# Altium PCB N64802.PcbDoc
Units mil, origin at the board's own origin, x right, y up, seen from the top; angles counter-clockwise.
Board outline 6000 x 4000 mil, 2 copper layers (Top Layer, Bottom Layer); 78 components, 80 nets, 378 pads, 81 vias.
Unrouted connection lines stored in the file: 117.
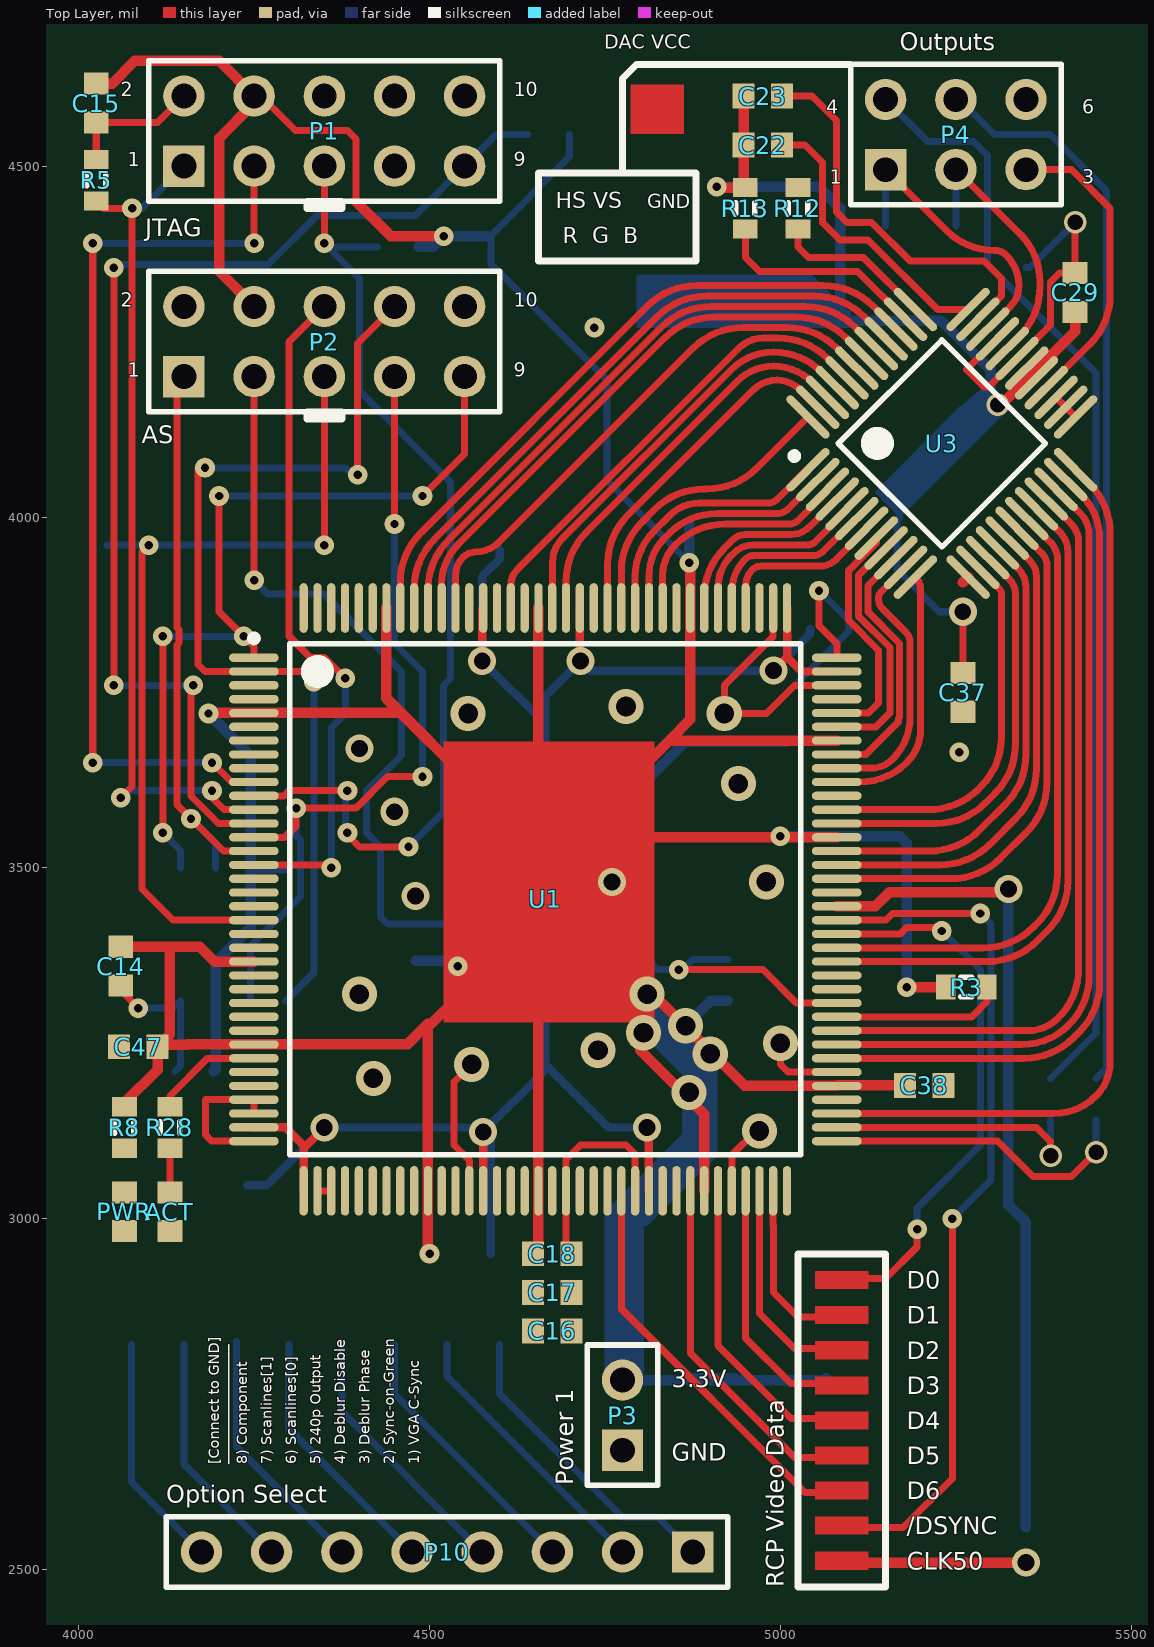
[diagram p0: Top Layer view]
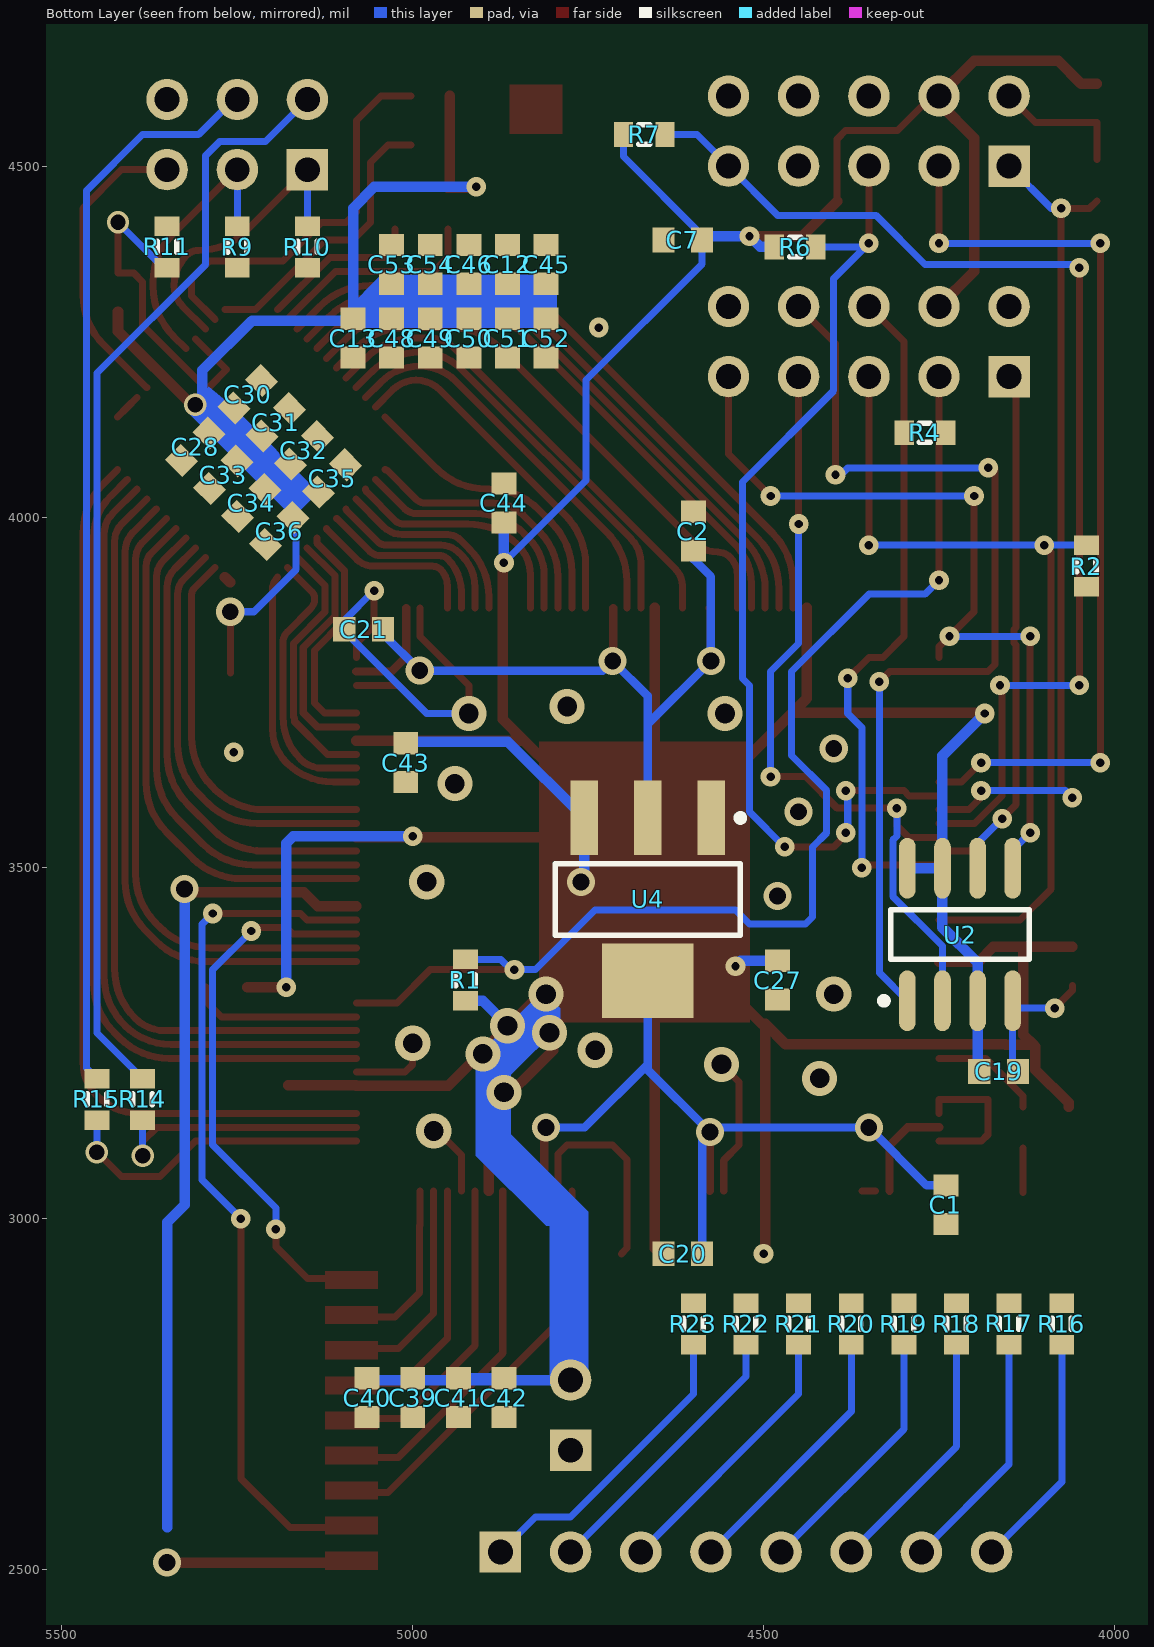
[diagram p1: Bottom Layer view, seen from below]

## Layer stack, top to bottom
Top Solder: solder mask 0.4, Solder Resist, Dk 3.5
Top Layer: signal copper 1.4
Dielectric 1: dielectric 12.6, FR-4, Dk 4.8
Bottom Layer: signal copper 1.4
Bottom Solder: solder mask 0.4, Solder Resist, Dk 3.5

## Board outline
1000,1000 7000,1000 7000,5000 1000,5000

## Design rules (kind name [scope] priority, off if disabled: settings)
Clearance [All] p1: gap=4
PolygonConnect [All] p1: connectstyle=Relief reliefconductorwidth=10 reliefentries=4 polygonreliefangle="90 Angle" airgapwidth=10
RoutingVias [All] p1: holewidth=22 width=32 viastyle="Through Hole" minholewidth=12 minwidth=28 maxholewidth=24 maxwidth=40
SolderMaskExpansion [All] p1: expansion=4
UnpouredPolygon [All] p1: allowunpoured=FALSE
Width Width_VCC3.3 [InNet('VCC3.3')] p1: maxlimit=25 minlimit=15 preferedwidth=20 minimp=50.000000 maximp=50.000000 favimp=50.000000
Width Width_VCC1.2 [InNet('VCC1.2')] p2: maxlimit=20 minlimit=12 preferedwidth=16 minimp=50.000000 maximp=50.000000 favimp=50.000000
Width Width_CLK [InNet('CLK50')] p3: maxlimit=20 minlimit=8 preferedwidth=14 minimp=50.000000 maximp=50.000000 favimp=50.000000
Width Width_1 [All] p4: maxlimit=25 minlimit=25 preferedwidth=25 minimp=50.000000 maximp=50.000000 favimp=50.000000
29 further rules are at their usual default settings.

## Components (designator, comment, footprint, x,y, rotation, side; value= is the part's Value field where it differs from the comment)
ACT "User LED" 1608[0603] 4130,3010 r270 top (schematic designator LED2)
C1 "Cap" 1608[0603] 4240,3020 r90 bottom
C2 "Cap" 1608[0603] 4600,3980 r270 bottom
C7 "Cap" 1608[0603] 4615,4395 r0 bottom
C12 "Cap" 1608[0603] 4865,4360 r270 bottom
C13 "Cap" 1608[0603] 5085,4255 r90 bottom
C14 "Cap" 1608[0603] 4060,3360 r90 top
C15 "Cap" 1608[0603] 4025,4590 r90 top
C16 "Cap" 1608[0603] 4675,2840 r180 top
C17 "Cap" 1608[0603] 4675,2895 r180 top
C18 "Cap" 1608[0603] 4675,2950 r180 top
C19 "Cap" 1608[0603] 4165,3210 r0 bottom
C20 "Cap" 1608[0603] 4615,2950 r180 bottom
C21 "Cap" 1608[0603] 5070,3840 r180 bottom
C22 "Cap" 1608[0603] 4975,4530 r0 top
C23 "Cap" 1608[0603] 4975,4600 r180 top
C27 "Cap" 1608[0603] 4480,3340 r90 bottom
C28 "Cap" 1608[0603] 5310,4100 r315 bottom
C29 "Cap" 1608[0603] 5420,4320 r90 top
C30 "Cap" 1608[0603] 5235,4175 r135 bottom
C31 "Cap" 1608[0603] 5195,4135 r135 bottom
C32 "Cap" 1608[0603] 5155,4095 r135 bottom
C33 "Cap" 1608[0603] 5270,4060 r315 bottom
C34 "Cap" 1608[0603] 5230,4020 r315 bottom
C35 "Cap" 1608[0603] 5115,4055 r135 bottom
C36 "Cap" 1608[0603] 5190,3980 r315 bottom
C37 "Cap" 1608[0603] 5260,3750 r270 top
C38 "Cap" 1608[0603] 5205,3190 r180 top
C39 "Cap" 1608[0603] 5000,2745 r90 bottom
C40 "Cap" 1608[0603] 5065,2745 r90 bottom
C41 "Cap" 1608[0603] 4935,2745 r90 bottom
C42 "Cap" 1608[0603] 4870,2745 r90 bottom
C43 "Cap" 1608[0603] 5010,3650 r90 bottom
C44 "Cap" 1608[0603] 4870,4020 r270 bottom
C45 "Cap" 1608[0603] 4810,4360 r270 bottom
C46 "Cap" 1608[0603] 4920,4360 r270 bottom
C47 "Cap" 1608[0603] 4085,3245 r180 top
C48 "Cap" 1608[0603] 5030,4255 r270 bottom
C49 "Cap" 1608[0603] 4975,4255 r270 bottom
C50 "Cap" 1608[0603] 4920,4255 r270 bottom
C51 "Cap" 1608[0603] 4865,4255 r270 bottom
C52 "Cap" 1608[0603] 4810,4255 r270 bottom
C53 "Cap" 1608[0603] 5030,4360 r90 bottom
C54 "Cap" 1608[0603] 4975,4360 r90 bottom
P1 "JTAG" HDR2X5 4150,4500 r0 top
P2 "AS" HDR2X5 4150,4200 r0 top
P3 "VIN" HDR1X2 4775,2670 r90 top
P4 "Output" HDR2X3_CEN 5150,4495 r0 top
P10 "Switches" HDR1X8 4875,2525 r180 top
PWR "Power LED" 1608[0603] 4065,3010 r270 top (schematic designator LED1)
R1 "Res3" J1-0603 4925,3340 r270 bottom
R2 "Res3" J1-0603 4040,3930 r270 bottom
R3 "Res3" J1-0603 5265,3330 r180 top
R4 "Res3" J1-0603 4270,4120 r0 bottom
R5 "Res3" J1-0603 4025,4480 r270 top
R6 "Res3" J1-0603 4455,4385 r0 bottom
R7 "Res3" J1-0603 4670,4545 r0 bottom
R8 "Res3" J1-0603 4065,3130 r90 top
R9 "Res3" J1-0603 5250,4385 r90 bottom
R10 "Res3" J1-0603 5150,4385 r90 bottom
R11 "Res3" J1-0603 5350,4385 r90 bottom
R12 "Res3" J1-0603 5025,4440 r90 top
R13 "Res3" J1-0603 4950,4440 r90 top
R14 "Res3" J1-0603 5385,3170 r90 bottom
R15 "Res3" J1-0603 5450,3170 r90 bottom
R16 "Res3" J1-0603 4075,2850 r90 bottom
R17 "Res3" J1-0603 4150,2850 r90 bottom
R18 "Res3" J1-0603 4225,2850 r90 bottom
R19 "Res3" J1-0603 4300,2850 r90 bottom
R20 "Res3" J1-0603 4375,2850 r90 bottom
R21 "Res3" J1-0603 4450,2850 r90 bottom
R22 "Res3" J1-0603 4525,2850 r90 bottom
R23 "Res3" J1-0603 4600,2850 r90 bottom
R28 "Res3" J1-0603 4130,3130 r90 top
U1 "EP2C5T144C8N" TQFP144_N 4665,3455 r0 top
U2 "EPCS4SI8N" SOIC8_N 4220,3405 r90 bottom
U3 "ADV7123JSTZ240" ST-48_M 5230,4105 r45 top
U4 "LD1117AS12TR" SOT223_M 4665,3455 r270 bottom

## Footprints (in the part's own frame and the unit in brackets; to place one, negate y for a bottom-side part, rotate by r counter-clockwise, add the part's x,y. Pads: shape width x height; smd on the part's side, far side on the other; paste and mask are expansions set on the pad)
1608[0603] [mm] "Chip Capacitor, Body 1.6x0.8mm, IPC High Density"
  rect 0.8x0.9 smd: 1(-0.7,0) 2(0.7,0)
  body extent -0.87,-0.48 0.87,0.48, height 1.3
HDR1X2 [mm] "Connector; Header; 2 Position"
  rect 1.5x1.5 hole 0.9: 1(0,0)
  round 1.5 hole 0.9: 2(2.54,0)
  silkscreen extent -1.27,-1.27 3.81,1.27
HDR1X8 [mm] "Connector; Header; 8 Position"
  rect 1.5x1.5 hole 0.9: 1(0,0)
  round 1.5 hole 0.9: 2(2.54,0) 3(5.08,0) 4(7.62,0) 5(10.16,0) 6(12.7,0) 7(15.24,0) 8(17.78,0)
  silkscreen extent -1.27,-1.27 19.05,1.27
HDR2X3_CEN [mm] "Connector; Header; 3x2 Position"
  rect 1.5x1.5 hole 0.9: 1(0,0)
  round 1.5 hole 0.9: 2(2.54,0) 3(5.08,0) 4(0,2.54) 5(2.54,2.54) 6(5.08,2.54)
  silkscreen extent -1.27,-1.27 6.35,3.81
HDR2X5 [mm] "Connector; Header; 5x2 Position"
  rect 1.5x1.5 hole 0.9: 1(0,0)
  round 1.5 hole 0.9: 2(0,2.54) 3(2.54,0) 4(2.54,2.54) 5(5.08,0) 6(5.08,2.54) 7(7.62,0) 8(7.62,2.54) 9(10.16,0) 10(10.16,2.54)
  silkscreen extent -1.27,-1.27 11.43,3.81
J1-0603 [mm] "Chip Resistor, Body 1.6x0.8mm, IPC High Density"
  rect 0.7x0.9 smd: 1(-0.75,0) 2(0.75,0)
  silkscreen extent -0.2,-0.35 0.2,0.35, body extent -0.85,-0.48 0.85,0.48, height 0.9
SOIC8_N [mm] "SOIC, 8-Leads, Body 4.9x3.9mm, Pitch 1.27mm, IPC Medium Density"
  oval 2.2x0.6 smd: 1(-2.4,1.905) 2(-2.4,0.635) 3(-2.4,-0.635) 4(-2.4,-1.905) 5(2.4,-1.905) 6(2.4,-0.635) 7(2.4,0.635) 8(2.4,1.905)
  silkscreen extent -2.52,-2.5 0.9,2.88, body extent -2,-2.5 2,2.5, height 1.75
SOT223_M [mm] "SOT223, 4-Leads, Body 6.5x3.5mm, Pitch 2.3mm, Lead Span 7mm, IPC Low Density"
  rect 2.7x1 smd: 1(-2.95,2.3) 2(-2.95,0) 3(-2.95,-2.3)
  rect 2.7x3.3 smd: 4(2.95,0)
  silkscreen extent -3.07,-3.35 1.3,3.47, body extent -1.85,-3.35 1.85,3.35, height 1.7
ST-48_M [mm] "Thin QFP, 48-Leads, Body 7x7mm, Pitch 0.5mm, IPC Low Density"
  oval 2.1x0.3 smd: 1(-4.1,2.75) 2(-4.1,2.25) 3(-4.1,1.75) 4(-4.1,1.25) 5(-4.1,0.75) 6(-4.1,0.25) 7(-4.1,-0.25) 8(-4.1,-0.75) 9(-4.1,-1.25) 10(-4.1,-1.75) 11(-4.1,-2.25) 12(-4.1,-2.75) 25(4.1,-2.75) 26(4.1,-2.25) 27(4.1,-1.75) 28(4.1,-1.25) 29(4.1,-0.75) 30(4.1,-0.25) 31(4.1,0.25) 32(4.1,0.75) 33(4.1,1.25) 34(4.1,1.75) 35(4.1,2.25) 36(4.1,2.75)
  oval 0.3x2.1 smd: 13(-2.75,-4.1) 14(-2.25,-4.1) 15(-1.75,-4.1) 16(-1.25,-4.1) 17(-0.75,-4.1) 18(-0.25,-4.1) 19(0.25,-4.1) 20(0.75,-4.1) 21(1.25,-4.1) 22(1.75,-4.1) 23(2.25,-4.1) 24(2.75,-4.1) 37(2.75,4.1) 38(2.25,4.1) 39(1.75,4.1) 40(1.25,4.1) 41(0.75,4.1) 42(0.25,4.1) 43(-0.25,4.1) 44(-0.75,4.1) 45(-1.25,4.1) 46(-1.75,4.1) 47(-2.25,4.1) 48(-2.75,4.1)
  silkscreen extent -4.22,-2.65 2.65,3.57, body extent -3.5,-3.5 3.5,3.5, height 1.6
TQFP144_N [mm] "Thin QFP, 144-Leads, Body 20x20mm, Pitch 0.5mm, IPC Medium Density"
  oval 1.8x0.3 smd: 1(-10.55,8.75) 2(-10.55,8.25) 3(-10.55,7.75) 4(-10.55,7.25) 5(-10.55,6.75) 6(-10.55,6.25) 7(-10.55,5.75) 8(-10.55,5.25) 9(-10.55,4.75) 10(-10.55,4.25) 11(-10.55,3.75) 12(-10.55,3.25) 13(-10.55,2.75) 14(-10.55,2.25) 15(-10.55,1.75) 16(-10.55,1.25) 17(-10.55,0.75) 18(-10.55,0.25) 19(-10.55,-0.25) 20(-10.55,-0.75) 21(-10.55,-1.25) 22(-10.55,-1.75) 23(-10.55,-2.25) 24(-10.55,-2.75) 25(-10.55,-3.25) 26(-10.55,-3.75) 27(-10.55,-4.25) 28(-10.55,-4.75) 29(-10.55,-5.25) 30(-10.55,-5.75) 31(-10.55,-6.25) 32(-10.55,-6.75) 33(-10.55,-7.25) 34(-10.55,-7.75) 35(-10.55,-8.25) 36(-10.55,-8.75) 73(10.55,-8.75) 74(10.55,-8.25) 75(10.55,-7.75) 76(10.55,-7.25) 77(10.55,-6.75) 78(10.55,-6.25) 79(10.55,-5.75) 80(10.55,-5.25) 81(10.55,-4.75) 82(10.55,-4.25) 83(10.55,-3.75) 84(10.55,-3.25) 85(10.55,-2.75) 86(10.55,-2.25) 87(10.55,-1.75) 88(10.55,-1.25) 89(10.55,-0.75) 90(10.55,-0.25) 91(10.55,0.25) 92(10.55,0.75) 93(10.55,1.25) 94(10.55,1.75) 95(10.55,2.25) 96(10.55,2.75) 97(10.55,3.25) 98(10.55,3.75) 99(10.55,4.25) 100(10.55,4.75) 101(10.55,5.25) 102(10.55,5.75) 103(10.55,6.25) 104(10.55,6.75) 105(10.55,7.25) 106(10.55,7.75) 107(10.55,8.25) 108(10.55,8.75)
  oval 0.3x1.8 smd: 37(-8.75,-10.55) 38(-8.25,-10.55) 39(-7.75,-10.55) 40(-7.25,-10.55) 41(-6.75,-10.55) 42(-6.25,-10.55) 43(-5.75,-10.55) 44(-5.25,-10.55) 45(-4.75,-10.55) 46(-4.25,-10.55) 47(-3.75,-10.55) 48(-3.25,-10.55) 49(-2.75,-10.55) 50(-2.25,-10.55) 51(-1.75,-10.55) 52(-1.25,-10.55) 53(-0.75,-10.55) 54(-0.25,-10.55) 55(0.25,-10.55) 56(0.75,-10.55) 57(1.25,-10.55) 58(1.75,-10.55) 59(2.25,-10.55) 60(2.75,-10.55) 61(3.25,-10.55) 62(3.75,-10.55) 63(4.25,-10.55) 64(4.75,-10.55) 65(5.25,-10.55) 66(5.75,-10.55) 67(6.25,-10.55) 68(6.75,-10.55) 69(7.25,-10.55) 70(7.75,-10.55) 71(8.25,-10.55) 72(8.75,-10.55) 109(8.75,10.55) 110(8.25,10.55) 111(7.75,10.55) 112(7.25,10.55) 113(6.75,10.55) 114(6.25,10.55) 115(5.75,10.55) 116(5.25,10.55) 117(4.75,10.55) 118(4.25,10.55) 119(3.75,10.55) 120(3.25,10.55) 121(2.75,10.55) 122(2.25,10.55) 123(1.75,10.55) 124(1.25,10.55) 125(0.75,10.55) 126(0.25,10.55) 127(-0.25,10.55) 128(-0.75,10.55) 129(-1.25,10.55) 130(-1.75,10.55) 131(-2.25,10.55) 132(-2.75,10.55) 133(-3.25,10.55) 134(-3.75,10.55) 135(-4.25,10.55) 136(-4.75,10.55) 137(-5.25,10.55) 138(-5.75,10.55) 139(-6.25,10.55) 140(-6.75,10.55) 141(-7.25,10.55) 142(-7.75,10.55) 143(-8.25,10.55) 144(-8.75,10.55)
  silkscreen extent -10.67,-9.25 9.25,9.57, body extent -10,-10 10,10, height 1.6

## Part data
ACT PWR: library part LED2, "Typical RED, GREEN, YELLOW, AMBER GaAs LED"
C1 C2 C7 C12 C13 C14 C15 C16 C17 C18 C19 C20 C21 C22 C23 C27 C28 C29 C30 C31 C32 C33 C34 C35 C36 C37 C38 C39 C40 C41 C42 C43 C44 C45 C46 C47 C48 C49 C50 C51 C52 C53 C54: library part "Cap Semi", "Capacitor (Semiconductor SIM Model)"
P1 P2: library part "Header 5X2", "Header, 5-Pin, Dual row"
P3: library part "Header 2", "Header, 2-Pin"
P4: library part "Header 3X2A", "Header, 3-Pin, Dual row"
P10: library part "Header 8", "Header, 8-Pin"
R1 R2 R3 R4 R5 R6 R7 R8 R9 R10 R11 R12 R13 R14 R15 R16 R17 R18 R19 R20 R21 R22 R23 R28: "Resistor"
U1: "Cyclone II Family, 1.2V FPGA, 89 I/O Pins, 2 PLLs, 144-Pin TQFP, Speed Grade 8, Commercial Grade, Pb-Free"
U2: "EPCS4 Series, In-system programmable 3.3V serial configuration device, 8-Pin SOIC, 4-Megabit, Industrial Grade, Pb-Free"
U3: "3 Channel 10-Bit CMOS High Speed Video Digital-to-Analog Converter, 330 MHz, 0 to 70 degC, ST-48, Pb-Free, Tray"
U4: "1A, Low Drop Positive Voltage Regulator, 1.2V, 4-Pin SOT-223, Tape and Reel"

## Via types
v1: diameter 28, hole 12, Top Layer to Bottom Layer, 48 vias
v2: diameter 50, hole 28, Top Layer to Bottom Layer, 16 vias
v3: diameter 40, hole 24, Top Layer to Bottom Layer, 13 vias
v4: diameter 32, hole 22, Top Layer to Bottom Layer, 4 vias

## Nets (pads, with @x,y where several pads share a name; then routed paths per layer and width w, separated by ;. In a path a pad name is that pad's centre, name@x,y a point inside that pad or via, vN(x,y) a via of type N, cw(c..) or ccw(c..) an arc to the next point about the centre after c; other vN are vias at no path point)
/DSYNC: U1.89 | length 1231.6
  Top Layer w10: U1.89 5150.47,3425.47 5160,3435 v1(5285,3435) ; 5085,2560 5175,2560 5245,2630 v1(5245,3000)
  Bottom Layer w10: v1(5245,3000) 5300,3055 5300,3420 v1(5285,3435)
/SW_15KHZ: P10.5 R19.1 U1.43
/SW_SCAN0: P10.6 R18.1 U1.42
/SW_SCAN1: P10.7 R17.1 U1.41
/SW_SHARP_COL: P10.3 R21.1 U1.45
/SW_SHARP_EN: P10.4 R20.1 U1.44
/SW_SOG: P10.2 R22.1 U1.47
/SW_VGA_CSYNC: P10.1 R23.1 U1.48
/SW_YPBPR: P10.8 R16.1 U1.40
ASDO: P2.9 U1.1 U2.5 | length 1191.8
  Top Layer w10: v1(4120,3550) v1(4120,3830) ; v1(4200,4030) 4200,3865 v1(4235,3830) 4249.65,3815.35 U1.1 ; v1(4490,4030) 4550,4090 P2.9
  Bottom Layer w10: v1(4120,3550) 4145,3525 U2.5 ; v1(4120,3830) v1(4235,3830) ; v1(4200,4030) v1(4490,4030)
CLK50: U1.90 | length 1445.5
  Top Layer w15: U1.90 5135.16,3445.16 5155.5,3465.5 5300.56,3465.5 5301.06,3465 5324.69,3465 5325,3465.32 v3(5325,3470) ; 5085,2515 5090,2510 v3(5350,2510)
  Bottom Layer w15: v3(5325,3470) 5325,3020 5350,2995 5350,2560
CONF_DONE: P2.3 R1.1 U1.83 | length 1726.6
  Top Layer w10: v1(4250,3910) P2.3 ; v1(4855,3355) 4975,3355 5022.64,3307.36 U1.83
  Bottom Layer w10: v1(4250,3910) 4270,3890 4350,3890 4460,3780 4460,3660 4410,3610 4410,3550 4430,3530 4430,3430 4440,3420 4520,3420 4540,3440 4740,3440 4825,3355 v1(4855,3355) 4860,3355 4874.53,3369.53 R1.1
D0: U1.88 | length 789.2
  Top Layer w10: U1.88 5170.79,3405.79 5180,3415 5225,3415 v1(5230,3410) ; 5090,2915 5150,2915 5195,2960 v1(5195,2985)
  Bottom Layer w10: v1(5195,2985) 5195,3015 5285,3105 5285,3355 v1(5230,3410)
D1: U1.71 | length 254.2
  Top Layer w10: U1.71 4989.8,2990.2 4990,2990 4990,2895 5025,2860 5085,2860
D2: U1.70 | length 315.3
  Top Layer w10: U1.70 4970.12,2864.88 5020,2815 5090,2815
D3: U1.69 | length 376.4
  Top Layer w10: U1.69 4950.43,2829.57 5015,2765 5090,2765
D4: U1.67 | length 442.7
  Top Layer w10: U1.67 4911.06,2818.94 5015,2715 5090,2715
D5: U1.65 | length 511.1
  Top Layer w10: U1.65 4871.69,2808.31 5020,2660 5090,2660
D6: U1.60 | length 593.1
  Top Layer w10: U1.60 4773.27,2871.73 5035,2610 5090,2610
DATA0: P2.7 U1.14 U2.2 | length 1183.6
  Top Layer w10: U1.14 4293.58,3543.58 4310,3560 v1(4310,3585) 4395,3585 4440,3630 v1(4490,3630) ; v1(4450,3990) P2.7
  Bottom Layer w10: U2.2 4245,3388.56 4315.81,3459.37 4315.81,3539.6 4310,3545.42 v1(4310,3585) ; v1(4450,3990) 4450,3820 4490,3780 v1(4490,3630)
DCLK: P2.1 U1.15 U2.6 | length 838.7
  Top Layer w10: P2.1 4140,4190 4140,3842.53 4143,3839.53 4143,3820.47 4140,3817.47 4140,3590 4206.1,3523.9 U1.15
  Bottom Layer w10: v1(4160,3570) 4195,3535 U2.6
GND: ACT.2 C1.1 C2.1 C7.2 C12.1 C13.1 C14.1 C15.1 C16.1 C17.1 C18.1 C19.1 C20.1 C21.1 C27.1 C28.2 C29.2 C30.2 C31.2 C32.2 C33.2 C34.2 C35.2 C36.2 C37.2 C38.1 C39.1 C40.1 C41.1 C42.1 C43.1 C44.1 C45.1 C46.1 C47.2 C48.2 C49.2 C50.2 C51.2 C52.2 C53.2 C54.2 P1.2 P1.10 P2.2 P2.10 P3.1 P4.6 PWR.2 R4.1 R5.1 R9.1 R10.1 R11.1 R12.2 U1.6 U1.19 U1.33 U1.34 U1.36 U1.38 U1.39 U1.49 U1.56 U1.61 U1.68 U1.78 U1.84 U1.85 U1.98 U1.106 U1.108 U1.110 U2.4 U3.25 U3.26 U3.27 U3.31 U3.33 U4.1 | length 2659.5
  Top Layer w10: R5.1 C15.1 4112.44,4562.44 P1.2 ; C14.1 4060,3325 v1(4085,3300) ; U1.36 4189.49,3110.51 4180.43,3119.57 4180.43,3169.57 U1.33 U1.34 ; U1.38 U1.39 ; U1.49 4556.73,3083.27 4535,3105 4535,3195 v2(4560,3220) ; C18.1 4694.53,2958.03 U1.56 4694.53,3084.53 4715,3105 4780,3105 4792.95,3092.05 U1.61 ; U1.68 4930.75,3090.75 4965,3125 v2(4970,3125) ; U1.110 4989.8,3829.8 4920,3760 v2(4920,3720) 4980,3720 5020.12,3760.12 U1.106 ; v2(5000,3250) 5000,3220 5011.06,3208.94 U1.78 ; v1(5055,3895) 5055,3845 5080.35,3819.65 U1.108 ; U3.33 5265.4,4210 5290,4185.4 5296.48,4185.4 U3.31 5384.98,4273.9 5384.98,4334.98 5397.56,4347.56 C29.2 v4(5420,4420) ; U3.27 U3.26 U3.25
  Bottom Layer w10: v1(4085,3300) 4134.49,3300 U2.4 4145,3217.56 C19.1 ; v2(4920,3720) 4980,3720 5097.56,3837.56 C21.1 5097.56,3852.44 v1(5055,3895) ; R11.1 5355.47,4355.47 v4(5420,4420)
  other v1: 4735,4270
  other v2: 4420,3200 4740,3240 4400,3320 4980,3480 4940,3620 4555,3720 4780,3730
  other v3: 4480,3460 4450,3580 4400,3670
NCE: P2.6 R4.2 U1.16 | length 985.9
  Top Layer w10: U1.16 4355.79,3504.21 v1(4360,3500) ; P2.6 4300,4250 4300,3830 4330,3800 4350,3800 v1(4380,3770)
  Bottom Layer w10: v1(4360,3500) 4360,3700 4380,3720 v1(4380,3770)
NCONFIG: P2.5 R2.1 U1.20 | length 1222.4
  Top Layer w10: v1(4100,3960) 4090,3950 4090,3470 4134.53,3425.47 U1.20 ; v1(4350,3960) P2.5
  Bottom Layer w10: R2.1 4040.47,3960 v1(4100,3960) v1(4350,3960)
NCSO: P2.8 U1.2 U2.1 | length 1433.9
  Top Layer w10: v1(4180,4070) 4180,4080 4170,4070 4170,3790 4180.2,3779.8 U1.2 4320.2,3779.8 v1(4335,3765) ; v1(4397.5,4060) 4397.5,4247.5 P2.8
  Bottom Layer w10: v1(4180,4070) 4380,4070 4390,4060 v1(4397.5,4060) ; U2.1 4335,3350.51 v1(4335,3765)
NetACT_1: ACT.1 R28.1 | length 62.9
  Top Layer w10: ACT.1 R28.1
NetP4_4: P4.4 R14.2 | length 1584.7
  Bottom Layer w10: P4.4 5210,4535 5275,4535 5295,4515 5295,4360 5450,4205 5450,3264.53 R14.2
NetP4_5: P4.5 R15.2 | length 1540.5
  Bottom Layer w10: P4.5 5255,4595 5305,4545 5385,4545 5465,4465 5465,3214.53 R15.2
NetPWR_1: PWR.1 R8.1
NSTATUS: R3.1 U1.82 | length 243.7
  Top Layer w10: U1.82 5272.68,3287.68 5294.53,3309.53 R3.1
TCK: P1.1 R5.2 U1.12 | length 1201.7
  Top Layer w10: R5.2 4035.47,4440 v1(4076,4440) 4076,3616 v1(4060,3600) ; v1@4190,3600 4207.05,3582.95 U1.12
  Bottom Layer w10: v1(4060,3600) 4070,3610 v1(4190,3610) ; v1(4076,4440) 4090,4440 P1.1
TDI: P1.9 R7.1 U1.13 | length 1641.8
  Top Layer w10: v1(4050,3760) v1(4050,4355) ; v1(4163,3760) 4160,3757 4160,3602.53 4199.26,3563.27 U1.13
  Bottom Layer w10: v1(4050,3760) v1(4163,3760) ; v1(4050,4355) 4055,4360 4270,4360 4340,4430 4480,4430 P1.9 4595,4545 R7.1
TDO: P1.3 U1.10 | length 1321.1
  Top Layer w10: v1(4020,3650) v1(4020,4390) ; v1(4190,3650) 4217.68,3622.32 U1.10 ; v1(4250,4390) P1.3
  Bottom Layer w10: v1(4020,3650) v1(4190,3650) ; v1(4020,4390) v1(4250,4390)
TMS: P1.5 R6.1 U1.11 | length 1437.6
  Top Layer w10: U1.11 4292.64,3602.64 4300,3610 v1(4383,3610) ; v1(4350,4390) P1.5 ; v1(4383,3550) 4383,3547 4400,3530 v1(4470,3530)
  Bottom Layer w10: v1(4350,4390) v1@4355,4385 ; v1(4383,3550) 4380,3553 4380,3610 v1(4383,3610) ; R6.1 v1@4355,4385 ; v1(4470,3530) 4520,3580 4520,3760 4530,3770 4530,4050 4400,4180 4400,4340 v1@4355,4385
USER_LED: R28.2 U1.30 | length 157.3
  Top Layer w10: R28.2 4130,3175 4183.62,3228.62 U1.30
VCC1.2: C1.2 C2.2 C20.2 C21.2 U1.35 U1.37 U1.50 U1.62 U1.107 U1.109 U1.124 U1.131 U4.2 U4.4 | length 2577
  Top Layer w12: U1.35 4294.8,3130.2 4320.51,3104.49 ; U1.37 4320.51,3104.49 ; v3(4350,3130) 4324.49,3104.49 4320.51,3104.49 ; v3(4575,3795) 4575,3868.94 U1.131 ; U1.50 v3(4576.42,3123.58) ; U1.124 4714.21,3795.79 v3(4715,3795) ; v3(4810,3130) 4812.64,3127.36 U1.62 ; v3(4990,3781.02) 5009.49,3800.51 ; U1.109 5009.49,3800.51 ; U1.107 5030.2,3779.8 5009.49,3800.51
  Bottom Layer w12: C1.2 4267.56,3047.56 v3(4350,3130) 4570,3130 v3(4576.42,3123.58) ; C20.2 4587.44,3112.56 v3(4576.42,3123.58) ; C2.2 4600,3940 4575,3915 v3(4575,3795) 4665,3705 ; U4.4 4665,3220 ; U4.2 4665,3705 ; v3(4810,3130) 4755,3130 4665,3220 ; C21.2 5042.44,3833.46 v3(4990,3781.02) 4728.98,3781.02 v3(4715,3795) 4665,3745 4665,3705 ; v3(4576.42,3123.58) 4665,3212.17 4665,3220
VCC3.3: C7.1 C12.2 C13.2 C14.2 C15.2 C16.2 C17.2 C18.2 C19.2 C38.2 C39.2 C40.2 C41.2 C42.2 C43.2 C44.2 C45.2 C46.2 P1.4 P2.4 P3.2 R1.2 R2.2 R3.2 R6.2 R7.2 R8.2 R16.2 R17.2 R18.2 R19.2 R20.2 R21.2 R22.2 R23.2 U1.5 U1.23 U1.29 U1.46 U1.54 U1.66 U1.77 U1.95 U1.102 U1.116 U1.127 U1.138 U2.3 U2.7 U2.8 U4.3 | length 7177.2
  Top Layer w10: P1.4 4260,4600 4309,4551 4383,4551 4395,4539 4395,4450
  Top Layer w15: C15.2 4047.56,4617.56 4080,4650 4200,4650 P1.4 4250,4590 4200,4540 4200,4350 P2.4 ; C14.2 4130,3387.56 ; R8.2 4065,3165 4112.56,3212.56 4112.56,3245 4115.12,3247.56 ; v1(4185,3720) 4185.75,3720.75 U1.5 4459.25,3720.75 ; U1.23 4193.58,3366.42 4172.44,3387.56 4130,3387.56 ; 4395,4450 4445,4400 v1(4520,4400) ; U1.138 4438.62,3741.38 4459.25,3720.75 ; v1(4500,2950) 4497.68,2952.32 U1.46 4497.68,3277.68 ; v1(4540,3360) 4540,3315 4502.68,3277.68 4497.68,3277.68 ; 4540,3640 4459.25,3720.75 ; C18.2 4655.16,2957.72 U1.54 4655.16,3315.16 4660,3320 ; U1.127 4655.16,3644.84 4660,3640 ; 4780,3540 4783.58,3543.58 v1@5001.42,3543.58 ; v2@4800,3320 4800,3240 4891.38,3148.62 U1.66 ; v2@4800,3340 4800,3338.5 4949.25,3189.25 U1.77 5081.1,3190 C38.2 ; 4800,3640 4841.38,3681.38 ; v1(4870,3935) 4871.69,3933.31 U1.116 4871.69,3711.69 4841.38,3681.38 ; v1(5000,3545) v1@5001.42,3543.58 ; U1.95 v1@5001.42,3543.58 ; U1.102 4841.38,3681.38 ; v1(5180,3330) R3.2 ; 5260,3906.72 5267.58,3914.3 ; 4115.12,3247.56 4155,3247.56 4155.75,3248.31 U1.29 4468.31,3248.31 4497.68,3277.68 ; 4115.12,3247.56 4130,3262.44 4130,3387.56
  Bottom Layer w15: v1(4185,3720) 4245,3660 U2.7 ; C19.2 4195,3212.44 U2.3 4195,3365 4245,3415 U2.7 ; U2.8 U2.7 ; 4480,3367.56 4532.44,3367.56 v1(4540,3360) ; R6.2 4505,4385 v1(4520,4400) C7.1@4582.44,4400 ; v3(4760,3480) 4755.55,3484.45 U4.3 4864.41,3680 C43.2@5010,3680 ; P3.2 5062.44,2770 C40.2 ; v2(4865,3275) 4900.47,3310.47 R1.2 ; C42.2 C41.2 ; v1(4870,3935) C44.2 ; v1(5000,3545) 5170,3545 5180,3535 v1(5180,3330)
  other v2: 4870,3180 4900,3235 4805,3265 4810,3320
VCC5.0: C22.1 C23.2 C27.2 C28.1 C29.1 C30.1 C31.1 C32.1 C33.1 C34.1 C35.1 C36.1 C37.1 C47.1 C48.1 C49.1 C50.1 C51.1 C52.1 C53.1 C54.1 R13.2 U3.13 U3.29 U3.30 | length 1092.9
  Top Layer w10: C37.1 v3(5260,3865) ; v4(5310,4160) v4@5310,4171.08
  Top Layer w15: v1(4909.53,4470.47) 4909.53,4469.53 R13.2 ; R13.2@4947.44,4472.09 C22.1 C23.2 ; v4(5310,4160) 5315,4160 5420,4265 C29.1
  Bottom Layer w15: v1(4909.53,4470.47) 5054.53,4470.47 5085,4440 5085,4282.56 5087.56,4280 5229,4280 5300,4209 5300,4170 v4(5310,4160)
VGA_B0: U1.97 U3.14 | length 548.3
  Top Layer w10: U1.97 5211.53,3582.95 ccw(c5211.53,3682.95) 5282.24,3612.24 5285.71,3615.71 ccw(c5215,3686.42) 5315,3686.42 5315,3890 ccw(c5303.59,3890) 5311.66,3898.07 U3.14
VGA_B1: U1.96 U3.15 | length 598
  Top Layer w10: U1.96 5221.85,3563.27 ccw(c5221.85,3663.27) 5292.56,3592.56 5305.71,3605.71 ccw(c5235,3676.42) 5335,3676.42 5335,3890 ccw(c5304.67,3890) 5326.12,3911.45 U3.15
VGA_B2: U1.94 U3.16 | length 652.2
  Top Layer w10: U1.94 5212.48,3523.9 ccw(c5212.48,3623.9) 5283.19,3553.19 5320.71,3590.71 ccw(c5250,3661.42) 5350,3661.42 5350,3900 ccw(c5312.81,3900) 5339.11,3926.29 U3.16
VGA_B3: U1.93 U3.17 | length 701.6
  Top Layer w10: U1.93 5227.79,3504.21 ccw(c5227.79,3604.21) 5298.5,3533.5 5335.71,3570.71 ccw(c5265,3641.42) 5365,3641.42 5365,3915 ccw(c5333.03,3915) 5355.64,3937.61 U3.17
VGA_B4: U1.92 U3.18 | length 751.1
  Top Layer w10: U1.92 5243.11,3484.53 ccw(c5243.11,3584.53) 5313.82,3513.82 5350.71,3550.71 ccw(c5280,3621.42) 5380,3621.42 5380,3930 ccw(c5353.25,3930) 5372.16,3948.92 U3.18
VGA_B5: U1.87 U3.19 | length 897.1
  Top Layer w10: U1.87 5289.68,3386.1 ccw(c5289.68,3486.1) 5360.39,3415.39 5365.71,3420.71 ccw(c5295,3491.42) 5395,3491.42 5395,3940 ccw(c5361.4,3940) 5385.16,3963.76 U3.19
VGA_B6: U1.86 U3.20 | length 940.1
  Top Layer w10: U1.86 5295,3366.42 ccw(c5295,3466.42) 5365.71,3395.71 5380.71,3410.71 ccw(c5310,3481.42) 5410,3481.42 5410,3950 ccw(c5369.54,3950) 5398.15,3978.61 U3.20
VGA_B7: U1.81 U3.21 | length 1085.4
  Top Layer w10: U1.81 5352.93,3267.99 ccw(c5352.93,3328.49) 5395.71,3285.71 ccw(c5325,3356.42) 5425,3356.42 5425,3965 ccw(c5389.76,3965) 5414.68,3989.92 U3.21
VGA_B8: U1.80 U3.22 | length 1127.1
  Top Layer w10: U1.80 5344.55,3248.31 ccw(c5344.55,3341.87) 5410.71,3275.71 ccw(c5340,3346.42) 5440,3346.42 5440,3975 ccw(c5397.91,3975) 5427.67,4004.77 U3.22
VGA_B9: U1.79 U3.23 | length 1168.3
  Top Layer w10: U1.79 5347.2,3228.62 ccw(c5347.2,3328.62) 5417.91,3257.91 5425.71,3265.71 ccw(c5355,3336.42) 5455,3336.42 5455,3970 ccw(c5369.84,3970) 5430.06,4030.22 U3.23
VGA_BLANK_N: U1.100 U3.11 | length 395.3
  Top Layer w10: U1.100 5128.63,3642.01 ccw(c5128.63,3686.37) 5160,3655 ccw(c5099.64,3715.36) 5185,3715.36 5185,3820 ccw(c5160.86,3820) 5177.93,3837.07 5145,3870 cw(c5157.07,3882.07) 5140,3882.07 5140,3885 cw(c5151.41,3885) 5143.34,3893.07 U3.11
VGA_CLOCK: U1.75 U3.24 | length 1290.2
  Top Layer w10: U1.75 5389.36,3149.88 ccw(c5389.36,3235.64) 5450,3175 ccw(c5401.72,3223.28) 5470,3223.28 5470,3976.69 ccw(c5370,3976.69) 5440.71,4047.4 U3.24
VGA_COMP: C23.1 U3.35 | length 568.5
  Top Layer w10: C23.1 5045,4600 5080,4565 5080,4435 5095,4420 5130,4420 5185,4365 5290,4365 5315,4340 5315,4315 5281.78,4281.78 U3.35
VGA_G0: U1.120 U3.1 | length 368.9
  Top Layer w10: U1.120 4792.95,3914.7 cw(c4885.3,3914.7) 4820,3980 4842.32,4002.32 cw(c4885,3959.64) 4885,4020 4982.93,4020 ccw(c4982.93,4037.07) 4995,4025 5036.08,4066.08 cw(c5039.3,4062.86) U3.1
VGA_G1: U1.119 U3.2 | length 353.3
  Top Layer w10: U1.119 4812.64,3916.01 cw(c4888.99,3916.01) 4835,3970 4841.72,3976.72 cw(c4910,3908.43) 4910,4005 4995,4005 ccw(c4995,4028.48) 5011.6,4011.88 U3.2
VGA_G2: U1.118 U3.3 | length 340.6
  Top Layer w10: U1.118 4832.32,3917.32 cw(c4892.68,3917.32) 4850,3960 4850.71,3960.71 cw(c4921.42,3890) 4921.42,3990 5012.93,3990 ccw(c5012.93,4007.07) 5025,3995 U3.3@5065.42,4035.42 ; U3.3@5065.43,4035.43 ccw(c5061.26,4039.58) U3.3
VGA_G3: U1.115 U3.4 | length 280.1
  Top Layer w10: U1.115 4891.38,3886.22 cw(c4988.78,3886.22) 4919.91,3955.09 4932.61,3967.8 cw(c4950,3950.41) 4950,3975 5015,3975 ccw(c5015,4012.19) 5041.29,3985.89 U3.4
VGA_G4: U1.114 U3.5 | length 270.9
  Top Layer w10: U1.114 4911.06,3899.28 cw(c4975.72,3899.28) 4930,3945 4934.39,3949.39 cw(c4960,3923.79) 4960,3960 5037.93,3960 ccw(c5037.93,3977.07) 5050,3965 5093.74,4008.74 ccw(c5090.74,4011.74) U3.5
VGA_G5: U1.113 U3.6 | length 255.9
  Top Layer w10: U1.113 4930.75,3893.52 cw(c4996.48,3893.52) 4950,3940 cw(c4962.07,3927.93) 4962.07,3945 5045.86,3945 ccw(c5045.86,3967.07) 5061.46,3951.46 5107.06,3997.06 cw(c5108.9,3995.21) U3.6
VGA_G6: U1.112 U3.7 | length 242.7
  Top Layer w10: U1.112 4950.43,3901.9 cw(c4983.1,3901.9) 4960,3925 cw(c4972.07,3912.93) 4972.07,3930 5055.86,3930 ccw(c5055.86,3964.14) 5080,3940 5122.06,3982.06 ccw(c5120.21,3983.9) U3.7
VGA_G7: U1.104 U3.8 | length 334.8
  Top Layer w10: U1.104 5125.75,3720.75 5140,3735 5140,3810 5097,3853 5097,3923.48 5136.74,3963.22 U3.8
VGA_G8: U1.103 U3.9 | length 354
  Top Layer w10: U1.103 5136.06,3701.06 5156,3721 5156,3814.2 5111,3859.2 5111,3916.4 U3.9
VGA_G9: U1.101 U3.10 | length 376.8
  Top Layer w10: U1.101 5121.69,3661.69 5168.19,3708.19 5168.19,3712.94 5170,3714.75 5170,3820 5125,3865 5125,3902.56 U3.10
VGA_HS: R14.1 U1.74 | length 383.5
  Top Layer w10: U1.74 5364.8,3130.2 5385,3110 v4(5385,3090)
  Bottom Layer w10: v4(5385,3090) R14.1
VGA_IOB: P4.3 R11.2 U3.28 | length 432.1
  Top Layer w10: P4.3 5415,4495 5470,4440 5470,4316.42 cw(c5370,4316.42) 5440.71,4245.71 5379.34,4184.34 U3.28
VGA_IOG: P4.2 R9.2 U3.32 | length 396.1
  Top Layer w10: P4.2 5341.72,4403.28 cw(c5273.43,4335) 5370,4335 5370,4328.18 cw(c5270,4328.18) 5340.71,4257.47 U3.32
  Bottom Layer w10: R9.2 P4.2
VGA_IOR: P4.1 R10.2 U3.34 | length 424.5
  Top Layer w10: P4.1 5236.72,4408.28 ccw(c5305,4476.57) 5305,4380 cw(c5305,4355.86) 5322.07,4372.93 cw(c5278.79,4329.64) 5340,4329.64 cw(c5298.45,4329.64) 5327.83,4300.27 U3.34
  Bottom Layer w10: R10.2 P4.1
VGA_PSAVE: R13.1 U3.38 | length 305.5
  Top Layer w10: R13.1 4950,4370 4970,4350 5110,4350 5178.22,4281.78 U3.38
VGA_R0: U1.137 U3.39 | length 955.2
  Top Layer w10: U1.137 4458.31,3906.89 cw(c4558.31,3906.89) 4487.6,3977.6 4810.71,4300.71 cw(c4881.42,4230) 4881.42,4330 5061.01,4330 cw(c5061.01,4230) 5131.73,4300.71 U3.39
VGA_R1: U1.136 U3.40 | length 909.5
  Top Layer w10: U1.136 4477.99,3897.76 cw(c4577.99,3897.76) 4507.28,3968.47 4824.52,4285.71 cw(c4895.23,4215) 4895.23,4315 5048.18,4315 cw(c5048.18,4215) 5118.89,4285.71 U3.40
VGA_R2: U1.135 U3.41 | length 868.4
  Top Layer w10: U1.135 4497.68,3896.26 cw(c4597.68,3896.26) 4526.97,3966.97 4830.71,4270.71 cw(c4901.42,4200) 4901.42,4300 5035.34,4300 cw(c5035.34,4200) 5106.05,4270.71 U3.41
VGA_R3: U1.134 U3.42 | length 828.9
  Top Layer w10: U1.134 4517.36,3905.35 cw(c4594.65,3905.35) 4540,3960 4835.71,4255.71 cw(c4906.42,4185) 4906.42,4285 5022.5,4285 cw(c5022.5,4185) 5093.21,4255.71 U3.42
VGA_R4: U1.133 U3.43 | length 784.2
  Top Layer w10: U1.133 4537.05,3916.66 cw(c4574.2,3916.66) 4547.93,3942.93 cw(c4565,3925.86) 4565,3950 ccw(c4565,3998.28) 4599.14,3964.14 4875.71,4240.71 cw(c4946.42,4170) 4946.42,4270 5009.66,4270 cw(c5009.66,4170) 5080.37,4240.71 U3.43
VGA_R5: U1.129 U3.44 | length 680.9
  Top Layer w10: U1.129 4615.79,3902.76 cw(c4647.24,3902.76) 4625,3925 4940.86,4240.86 cw(c4975,4206.72) 4975,4255 4996.82,4255 cw(c4996.82,4155) 5067.53,4225.71 U3.44
VGA_R6: U1.126 U3.45 | length 617.8
  Top Layer w10: U1.126 4675,3870.51 4675,3935 cw(c4723.28,3935) 4689.14,3969.14 4930.25,4210.25 cw(c4990,4150.5) 4990,4235 cw(c4990,4137.46) 5058.97,4206.43 U3.45
VGA_R7: U1.125 U3.46 | length 569.4
  Top Layer w10: U1.125 4694.53,3908.11 cw(c4794.53,3908.11) 4723.82,3978.82 4938.79,4193.79 cw(c4990,4142.57) 4990,4215 cw(c4990,4136.38) 5045.59,4191.97 U3.46
VGA_R8: U1.122 U3.47 | length 502.1
  Top Layer w10: U1.122 4753.58,3932.16 cw(c4853.58,3932.16) 4782.87,4002.87 4960.86,4180.86 cw(c4995,4146.72) 4995,4195 cw(c4995,4147.38) 5028.67,4181.05 U3.47
VGA_R9: U1.121 U3.48 | length 420.3
  Top Layer w10: U1.121 4773.27,3921.85 cw(c4873.27,3921.85) 4802.56,3992.56 4820.71,4010.71 cw(c4891.42,3940) 4891.42,4040 4895.3,4040 ccw(c4895.3,4140) 4966.01,4069.29 U3.48
VGA_RSET: R12.1 U3.37 | length 229.9
  Top Layer w10: R12.1 5025,4385 5040,4370 5118.11,4370 U3.37
VGA_SYNC_N: U1.99 U3.12 | length 378.7
  Top Layer w10: U1.99 5113.18,3622.32 ccw(c5113.18,3716.82) 5180,3650 ccw(c5131.72,3698.28) 5200,3698.28 5200,3896 ccw(c5174.11,3896) U3.12
VGA_VREF: C22.2 U3.36 | length 411.9
  Top Layer w10: C22.2 5035,4530 5060,4505 5060,4420 5085,4395 5125,4395 5224.3,4295.7 U3.36
VGA_VS: R15.1 U1.73 | length 450.5
  Top Layer w10: U1.73 5309.49,3110.51 5360,3060 5415,3060 v4(5450,3095)
  Bottom Layer w10: v4(5450,3095) R15.1
pads on no net: P1.6 P1.7 P1.8 U1.3 U1.4 U1.7 U1.8 U1.9 U1.17 U1.18 U1.21 U1.22 U1.24 U1.25 U1.26 U1.27 U1.28 U1.31 U1.32 U1.51 U1.52 U1.53 U1.55 U1.57 U1.58 U1.59 U1.63 U1.64 U1.72 U1.76 U1.91 U1.105 U1.111 U1.117 U1.123 U1.128 U1.130 U1.132 U1.139 U1.140 U1.141 U1.142 U1.143 U1.144
copper on no net: | length 3994
  Bottom Layer w10: 4075,2820.47 4075,2625 4175,2525 ; 4150,2820.47 4150,2650 4275,2525 ; 4225,2825 4225,2675 4375,2525 ; 4300,2820.47 4300,2700 4475,2525 ; 4375,2820.47 4375,2725 4575,2525 ; 4450,2820.47 4450,2750 4675,2525 ; 4525,2820.47 4525,2775 4775,2525 ; 4587.44,4395 4587.44,4401.44 ; 4600,2820.47 4600,2750 4775,2575 4825,2575 4875,2525 ; 4699.53,4545 4699.53,4513.53 4587.44,4401.44 ; 4870,3935 4753,4052 4753,4195 4587.44,4360.56 4587.44,4401.44 ; 5170.51,3999.49 5166.03,3995 5166.03,3924.97 5226,3865 5260,3865
  other v1: 5255,3665

## Other copper
Top Layer:
  region net VCC5.0: 4787,4571 4862,4571 4862,4546 4787,4546
  region net VCC5.0: 4787,4593 4862,4593 4862,4568 4787,4568
  region net VCC5.0: 4787,4616 4862,4616 4862,4591 4787,4591
  region net VCC3.3: 4820,3680 4820,3280 4520,3280 4520,3680
  region net D0: 5050,2925 5125,2925 5125,2900 5050,2900
  region net D1: 5050,2875 5125,2875 5125,2850 5050,2850
  region net D3: 5050,2775 5125,2775 5125,2750 5050,2750
  region net D2: 5050,2825 5125,2825 5125,2800 5050,2800
  region net D5: 5050,2675 5125,2675 5125,2650 5050,2650
  region net D4: 5050,2725 5125,2725 5125,2700 5050,2700
  region net CLK50: 5050,2525 5125,2525 5125,2500 5050,2500
  region net /DSYNC: 5050,2575 5125,2575 5125,2550 5050,2550
  region net D6: 5050,2625 5125,2625 5125,2600 5050,2600
Bottom Layer:
  region net VCC5.0: 4795,4345 5045,4345 5095,4295 5100,4295 5100,4270 4795,4270
  region net VCC3.3: 4750,2758.14 4750,3010 4860,3120 4860,3205 4790,3275 4790,3300 4815,3325 4905,3235 4910,3235 4910,3090 4810,2990 4805,2990 4805,2763.94 4791.59,2762.52 4790,2770 4789.68,2755.11 4781.01,2754.91 4780,2770 4777.76,2758.76 4770,2760 4769.19,2756.14
  region net VCC5.0: 5254.49,4155.51 5290.51,4185.4 5310,4160 5323.47,4152.44 5290.51,4119.49 5166.03,3995 5166.03,4003.97 5134.49,4035.51

## Silkscreen, mask and mechanical layers (free items; w line width, h text height)
Top Overlay:
  lines w10: 4775,4490 4775,4625 4795,4645 5100,4645 ; 4325,4140 4325,4150 4375,4150 4375,4140 4325,4140 ; 4325,4440 4375,4440 4375,4450 4325,4450 4325,4440 ; 4655,4365 4880,4365 4880,4490 4655,4490 4655,4365 ; 5025,2475 5150,2475 5150,2950 5025,2950 5025,2475
  text "DAC VCC" at 4749,4667 h20
  text "Outputs" at 5170,4665 h25
  text "HS VS" at 4680,4440 h23
  text "GND" at 4810,4440 h20
  text "JTAG" at 4095,4400 h25
  text "R  G  B" at 4690,4390 h23
  text "AS" at 4090,4105 h25
  text "D0" at 5180,2900 h25
  text "D1" at 5180,2850 h25
  text "D2" at 5180,2800 h25
  text "3.3V" at 4845,2760 h25
  text "D3" at 5180,2750 h25
  text "D4" at 5180,2700 h25
  text "GND" at 4845,2655 h25
  text "[Connect to GND]" at 4200,2650 h15 r90
  text "________________" at 4210,2650 h15 r90
  text "8) Component" at 4240,2650 h15 r90
  text "7) Scanlines[1]" at 4275,2650 h15 r90
  text "6) Scanlines[0]" at 4310,2650 h15 r90
  text "5) 240p Output" at 4345,2650 h15 r90
  text "4) Deblur Disable" at 4380,2650 h15 r90
  text "3) Deblur Phase" at 4415,2650 h15 r90
  text "2) Sync-on-Green" at 4450,2650 h15 r90
  text "1) VGA C-Sync" at 4485,2650 h15 r90
  text "D5" at 5180,2650 h25
  text "Power 1" at 4705,2620 h25 r90
  text "D6" at 5180,2600 h25
  text "Option Select" at 4125,2595 h25
  text "/DSYNC" at 5180,2550 h25
  text "CLK50" at 5180,2500 h25
  text "RCP Video Data" at 5005,2475 h25 r90
Top Solder:
  region: 4782,4576 4867,4576 4867,4541 4782,4541
  region: 4782,4598 4867,4598 4867,4563 4782,4563
  region: 4782,4621 4867,4621 4867,4586 4782,4586
  region: 5045,2930 5130,2930 5130,2895 5045,2895
  region: 5045,2880 5130,2880 5130,2845 5045,2845
  region: 5045,2830 5130,2830 5130,2795 5045,2795
  region: 5045,2780 5130,2780 5130,2745 5045,2745
  region: 5045,2730 5130,2730 5130,2695 5045,2695
  region: 5045,2680 5130,2680 5130,2645 5045,2645
  region: 5045,2580 5130,2580 5130,2545 5045,2545
  region: 5045,2530 5130,2530 5130,2495 5045,2495
  region: 5045,2630 5130,2630 5130,2595 5045,2595

## Text inside footprints (layer, text, board x,y; h text height)
P1: Top Overlay "10" at 4620,4600 h20; Top Overlay "9" at 4620,4500 h20; Top Overlay "1" at 4070,4500 h20; Top Overlay "2" at 4060,4600 h20
P2: Top Overlay "10" at 4620,4300 h20; Top Overlay "9" at 4620,4200 h20; Top Overlay "1" at 4070,4200 h20; Top Overlay "2" at 4060,4300 h20
P4: Top Overlay "4" at 5065,4575 h20; Top Overlay "1" at 5070,4475 h20; Top Overlay "3" at 5430,4475 h20; Top Overlay "6" at 5430,4575 h20